# Altium PCB Ticket_Dispancer.PcbDoc (part 5 of 5)
Units mm, origin at the board's own origin, x right, y up, seen from the top; angles counter-clockwise.
Board outline 150.11 x 200.66 mm, 2 copper layers (Top Layer, Bottom Layer); 297 components, 258 nets, 997 pads, 217 vias.
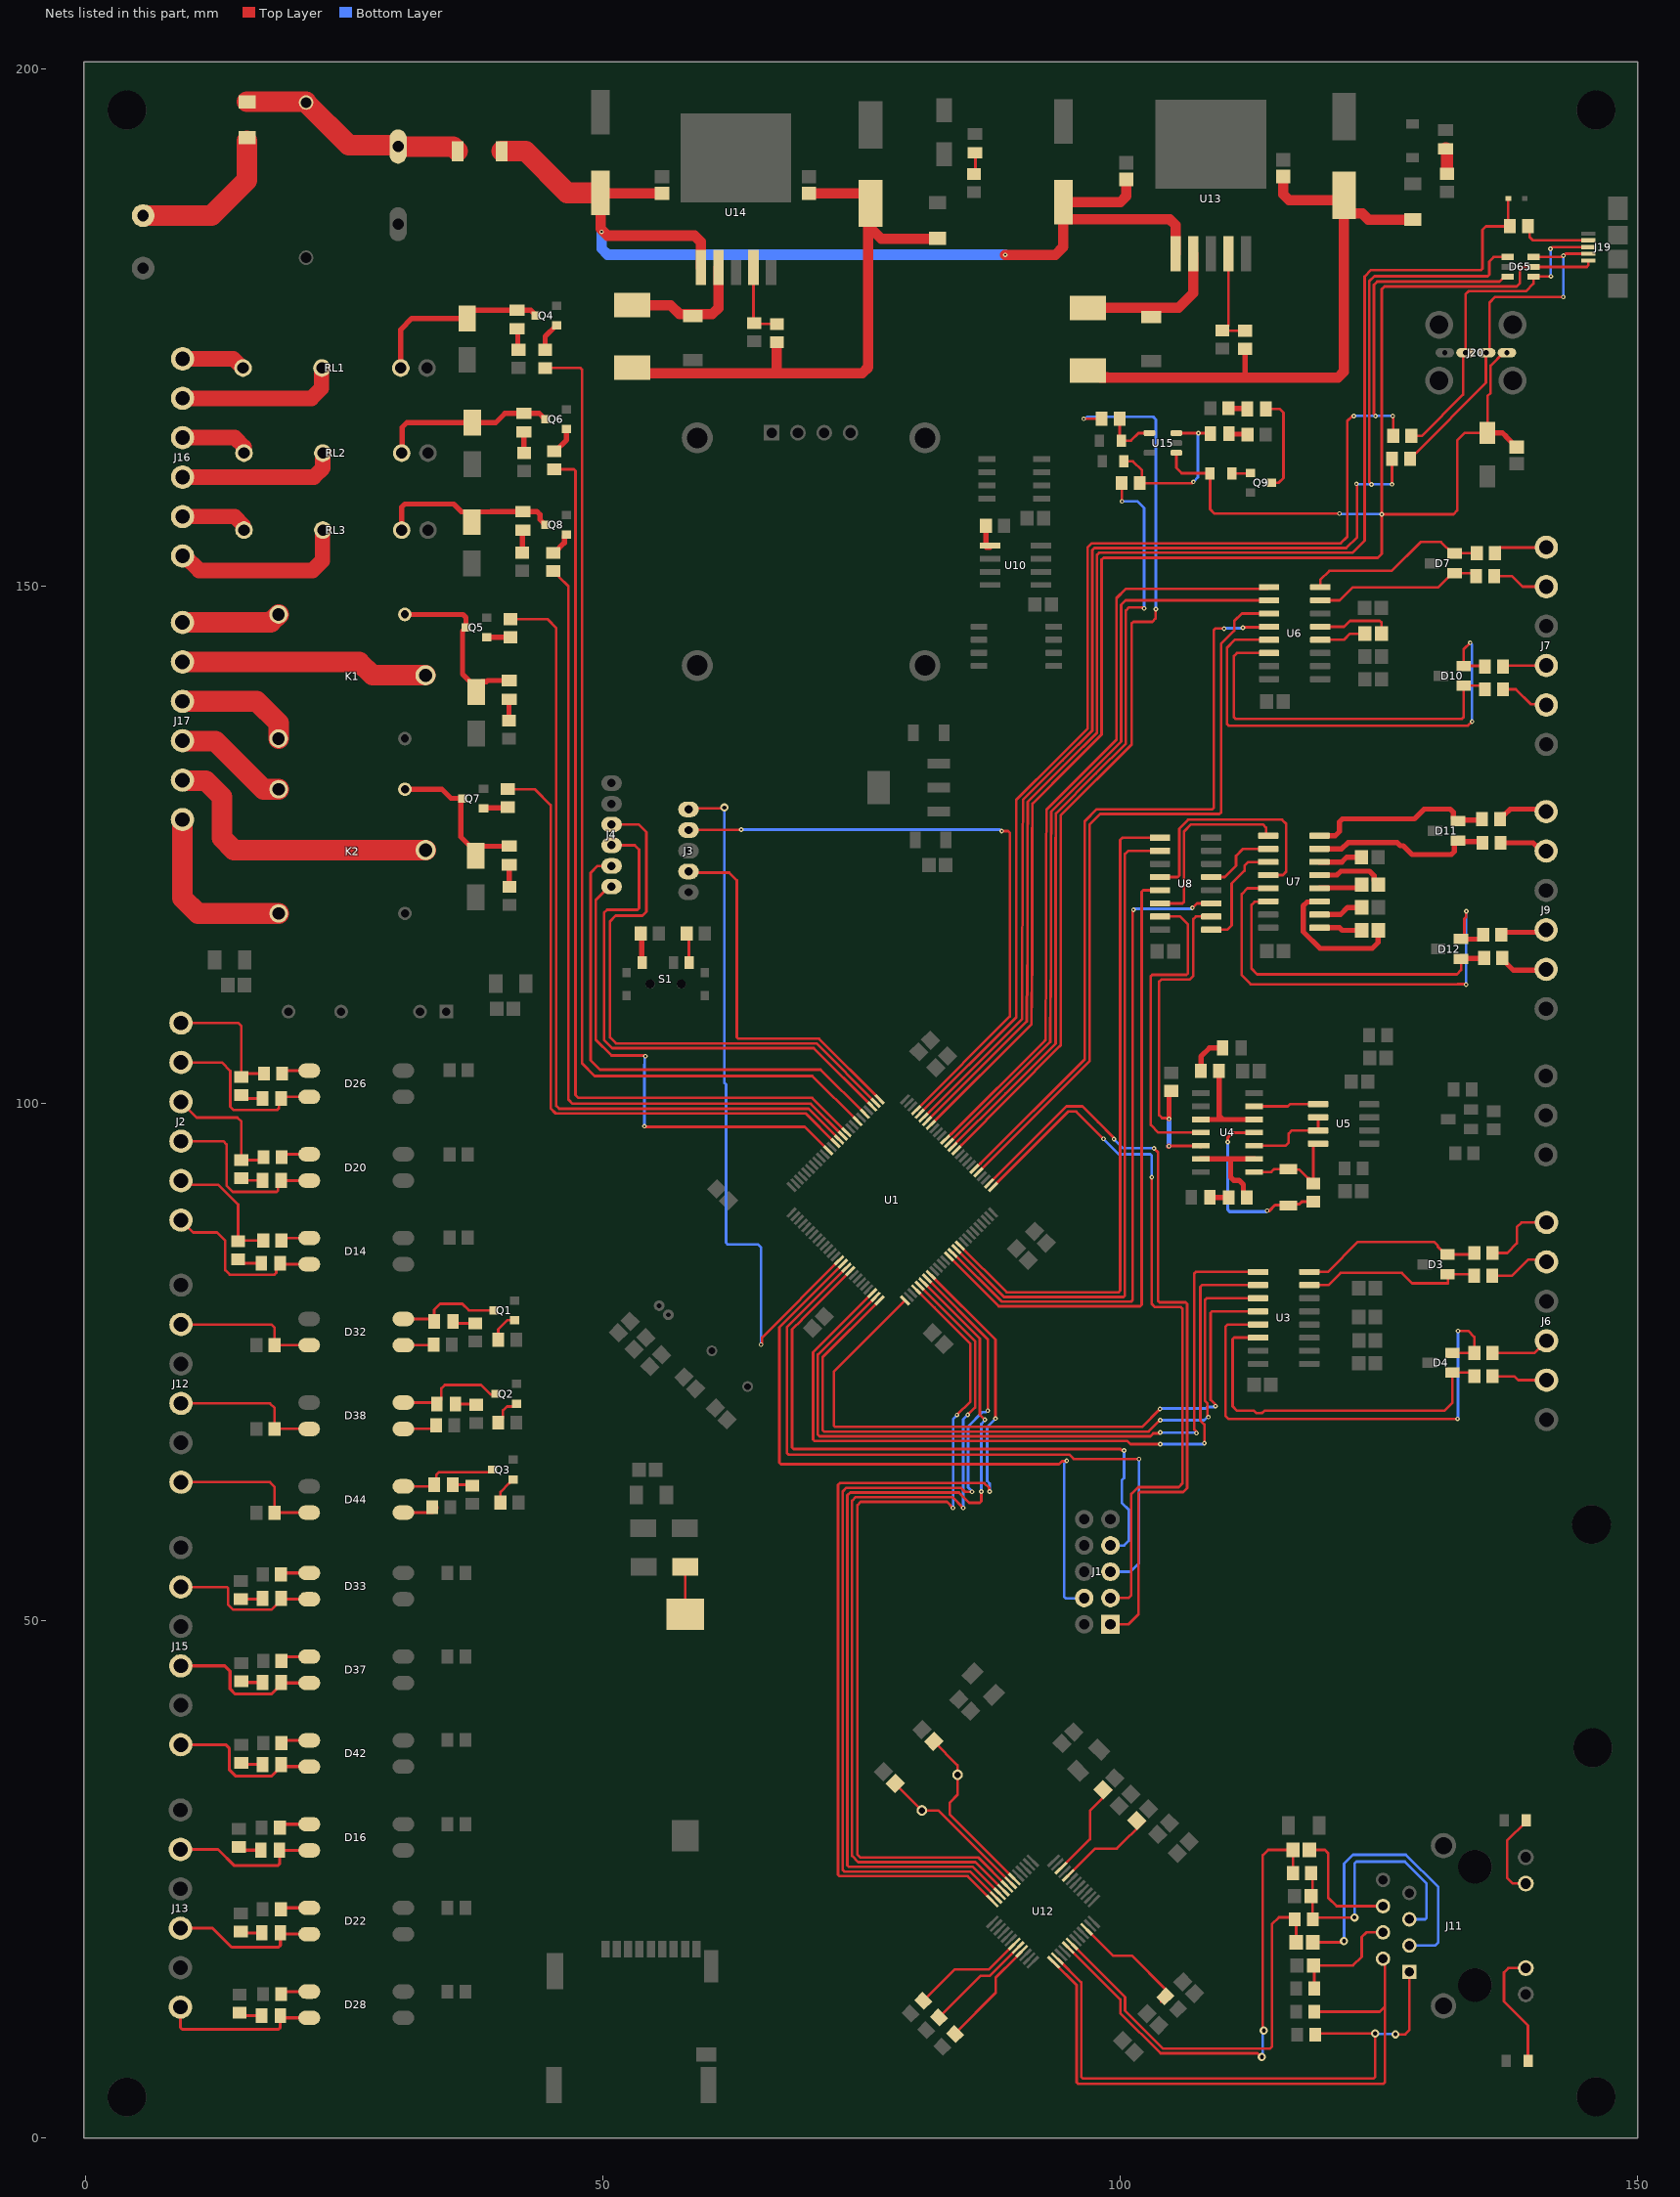
[diagram p3: the nets of this part, all layers, seen from the top]

## Via types
v1: diameter 0.45, hole 0.2, Top Layer to Bottom Layer, 169 vias
v2: diameter 0.8, hole 0.4, Top Layer to Bottom Layer, 48 vias

## Nets (pads, with @x,y where several pads share a name; then routed paths per layer and width w, separated by ;. In a path a pad name is that pad's centre, name@x,y a point inside that pad or via, vN(x,y) a via of type N, cw(c..) or ccw(c..) an arc to the next point about the centre after c; other vN are vias at no path point) (continued)
NetC30_1: C30.1 U6.5 | length 7.3
  Top Layer w0.254: U6.5@119.335,146.075 121.645,146.075 122.21,146.64 125.094,146.64 125.243,146.491 C30.1@125.243,145.396
NetC30_2: C30.2 U6.4 | length 4.6
  Top Layer w0.254: U6.4@119.335,144.805 121.615,144.805 122.206,145.396 C30.2@123.643,145.396
NetC33_1: C33.1 U7.3 | length 13.6
  Top Layer w0.5: U7.3@119.26,119.52 119.215,119.475 118.068,119.475 117.68,119.087 117.68,116.61 119.31,114.98 124.35,114.98 124.934,115.564 C33.1@124.934,116.729
NetC33_2: C33.2 U7.1 | length 4.2
  Top Layer w0.5: U7.1@119.26,116.98 121.21,116.98 121.461,116.729 C33.2@123.334,116.729
NetC34_2: C34.2 U7.2 | length 4.4
  Top Layer w0.5: U7.2@119.26,118.25 121.28,118.25 121.963,118.933 C34.2@123.334,118.933
NetC35_2: C35.2 U7.6 | length 4.2
  Top Layer w0.5: U7.6@119.26,123.33 121.42,123.33 121.88,123.79 C35.2@123.31,123.79
NetC36_1: C36.1 U7.5 | length 6.7
  Top Layer w0.5: U7.5@119.26,122.06 120.94,122.06 121.33,122.45 124.084,122.45 124.534,122.001 124.534,121.538 C36.1@124.934,121.138
NetC36_2: C36.2 U7.4 | length 4.2
  Top Layer w0.5: U7.4@119.26,120.79 119.305,120.835 123.031,120.835 C36.2@123.334,121.138
NetC48_2: C48.2 U12.31 Y3.2 | length 15.2
  Top Layer w0.254: C48.2@78.261,34.269 78.261,34.238 Y3.2@80.835,31.665 82.442,31.665 U12.31@89.428,24.679
NetC49_2: C49.2 U12.30 Y3.1 | length 17.2
  Top Layer w0.254: C49.2@81.976,38.344 84.285,36.035 Y3.1@84.285,35.115 84.285,33.165 83.54,32.42 83.54,31.274 U12.30@89.781,25.032
NetC50_1: C50.1 J11.4 R26.1 | length 11.4
  Top Layer w0.254: R26.1@118.764,14.45 118.764,16.608 C50.1@118.689,16.683 122.503,16.683 123.34,17.52 123.34,19.43 123.788,19.878 J11.4@125.402,19.878
NetC51_1: C51.1 R31.2 U12.5 | length 48.8
  Top Layer w0.254: U12.5@94.985,18.414 100.01,13.389 100.01,12.08 103.9,8.19 113.268,8.19 113.618,7.84 v2(113.69,7.84) ; v2(113.88,10.4) 113.78,10.5 113.78,27.33 114.294,27.844 C51.1@116.69,27.844 116.695,27.839 R31.2@116.695,25.612
  Bottom Layer w0.254: v2(113.69,7.84) 113.785,7.935 113.785,10.305 v2(113.88,10.4)
NetC51_2: C51.2 J11.6 | length 11.9
  Top Layer w0.254: C51.2@118.29,27.844 119.786,27.844 120.1,27.53 120.1,23.23 120.912,22.418 J11.6@125.402,22.418
NetC52_1: C52.1 R32.2 U12.6 | length 41
  Top Layer w0.254: U12.6@95.339,18.768 100.47,13.636 100.47,12.31 104.12,8.66 114.491,8.66 114.661,8.83 114.661,20.661 115.34,21.34 116.662,21.34 R32.2@116.854,21.147 117.009,20.992 C52.1@117.009,18.915
NetC52_2: C52.2 J11.3 | length 29.6
  Top Layer w0.254: C52.2@118.609,18.915 121.505,18.915 v2(121.635,19.045)
  Bottom Layer w0.254: v2(121.635,19.045) 121.635,26.525 122.49,27.38 127.61,27.38 130.74,24.25 130.74,18.94 130.408,18.608 J11.3@127.942,18.608
NetC53_2: C53.2 J11.5 R31.1 R32.1 | length 26.8
  Top Layer w0.254: R31.1@118.445,25.612 118.604,25.452 R32.1@118.604,21.147 118.777,21.32 v2(122.64,21.32)
  Bottom Layer w0.254: v2(122.64,21.32) 122.64,26.54 122.81,26.71 127.51,26.71 129.608,24.612 129.608,21.297 129.459,21.148 J11.5@127.942,21.148
NetC54_1: C54.1 U12.20 | length 9.5
  Top Layer w0.254: U12.20@94.985,25.386 97.579,27.98 99.679,27.98 C54.1@102.312,30.613
NetC55_1: C55.1 U12.22 | length 9.6
  Top Layer w0.254: U12.22@94.278,26.093 97.083,28.897 97.083,31.618 C55.1@99.114,33.65
NetC61_2: C61.2 C62.1 C66.2 C67.1 D56.C U13.1 U14.1 | length 106
  Top Layer w1: C66.2@55.72,187.96 49.821,187.96 C67.1@49.784,187.997 49.784,184.531 50.448,183.867 58.879,183.867 59.465,183.281 U14.1@59.465,180.789 ; v1(88.89,182.01) 93.74,182.01 94.51,182.78 C62.1@94.51,185.46 ; C61.2@100.59,189.3 100.59,187.696 100.004,187.11 C62.1@94.51,187.11 94.51,185.86 94.91,185.46 104.775,185.46 105.361,184.874 U13.1@105.361,182.118
  Top Layer w2: D56.C@40.225,192.024 42.545,192.024 46.572,187.997 C67.1@49.784,187.997
  Bottom Layer w1: v1(49.89,184.23) 49.89,182.606 50.476,182.02 88.88,182.02 v1(88.89,182.01)
NetC63_1: C63.1 C64.2 F2.1 L1.2 R94.1 | length 63.4
  Top Layer w0.5: 111.83,170.14 112.08,170.39 R94.1@112.08,172.925 ; C63.1@121.63,187.77 121.63,186.645 C63.1@122.53,185.745
  Top Layer w1: L1.2@96.901,170.838 97.476,170.838 98.151,170.163 98.714,170.163 98.737,170.14 111.83,170.14 121.044,170.14 121.63,170.726 C63.1@121.63,187.28 ; C64.2@115.75,189.58 115.75,187.866 116.336,187.28 121.14,187.28 C63.1@121.63,187.77 121.63,186.647 122.28,185.997 123.403,185.997 123.98,185.42 F2.1@128.27,185.42
NetC65_2: C65.2 D56.A F1.2 RV1.2 | length 22
  Top Layer w2: F1.2@15.621,196.797 C65.2@21.336,196.797 ; C65.2@21.336,196.73 25.467,192.599 RV1.2@29.972,192.599 ; RV1.2@30.226,192.472 35.527,192.472 D56.A@35.975,192.024
NetC68_1: C68.1 C69.2 F3.1 L2.2 R97.2 | length 54
  Top Layer w1: L2.2@52.832,171.092 53.354,170.57 66.72,170.57 ; R97.2@66.824,173.575 66.824,170.674 66.72,170.57 ; C69.2@69.93,187.96 75.22,187.96 C68.1@75.46,188.2 ; C68.1@75.89,186.97 75.66,186.74 75.66,171.156 75.074,170.57 66.72,170.57 ; 76.065,184.425 76.922,183.568 F3.1@81.788,183.568
NetD2_1: D2.1 J5.P | length 4.6
  Top Layer w0.254: D2.1@57.96,55.189 57.96,50.63 J5.P@57.97,50.62
NetD5_A: D5.A R6.2 | length 3.8
  Top Layer w0.5: R6.2@107.805,103.13 107.805,104.535 108.63,105.36 D5.A@109.88,105.36
NetD6_1: D6.1 R10.1 U4.11 | length 18.5
  Top Layer w0.3: v1(110.4,96.27) 110.4,96.72 110.857,97.177 U4.11@112.964,97.177 ; v1(114.2,89.63) 114.429,89.63 114.969,90.17 116.225,90.17 D6.1@116.27,90.125 116.412,90.267 117.312,90.267 117.535,90.49 R10.1@118.66,90.49
  Bottom Layer w0.3: v1(110.4,96.27) 110.4,89.716 110.576,89.54 114.11,89.54 v1(114.2,89.63)
NetD6_2: D6.2 R10.2 U4.8 U5.4 | length 10.8
  Top Layer w0.25: U4.8@112.964,93.367 114.617,93.367 114.905,93.655 D6.2@116.27,93.655 ; D6.2@116.312,93.613 117.279,93.613 R10.2@118.235,92.657 ; R10.2@118.66,92.24 U5.4@118.66,96.066
  Top Layer w0.5: D6.2@116.27,93.655 D6.2@116.312,93.613 ; R10.2@118.235,92.657 118.235,92.565 118.56,92.24 R10.2@118.66,92.24 ; U5.4@118.66,96.066 118.705,96.111 U5.4@119.125,96.111
NetD8_A: D8.A R12.2 | length 1.8
  Top Layer w0.5: D8.A@108.679,90.93 108.694,90.915 110.47,90.915 R12.2@110.485,90.9
NetD14_1: D14.1 R37.2 | length 2.8
  Top Layer w0.25: R37.2@18.95,86.76 19.18,86.99 D14.1@21.639,86.99
NetD14_2: D14.2 D18.C J2.1 | length 17.1
  Top Layer w0.25: J2.1@9.24,88.72 10.435,87.525 12.708,87.525 13.52,86.714 13.52,83.88 13.954,83.446 18.276,83.446 18.447,83.617 18.447,84.177 D18.C@18.82,84.55 18.92,84.45 D14.2@21.639,84.45
NetD16_1: D16.1 R40.2 | length 3
  Top Layer w0.3: R40.2@18.795,30.01 19.125,30.34 D16.1@21.639,30.34
NetD16_2: D16.2 D19.C J13.5 | length 14.5
  Top Layer w0.3: J13.5@9.19,27.9 12.83,27.9 14.4,26.33 18.594,26.33 18.77,26.506 D19.C@18.77,27.83 18.8,27.8 D16.2@21.639,27.8
NetD18_A: D18.A R41.2 | length 2.4
  Top Layer w0.25: R41.2@14.756,84.931 15.137,84.55 D18.A@17.02,84.55
NetD19_A: D19.A R42.1 | length 2.3
  Top Layer w0.3: R42.1@14.82,28.125 15.115,27.83 D19.A@16.97,27.83
NetD20_1: D20.1 R45.2 | length 2.8
  Top Layer w0.25: R45.2@18.959,94.81 19.229,95.08 D20.1@21.639,95.08
NetD20_2: D20.2 D24.C J2.3 | length 17.6
  Top Layer w0.25: J2.3@9.24,96.34 13.35,96.34 13.65,96.04 13.65,92.05 14.254,91.446 18.476,91.446 18.626,91.596 18.626,92.252 D24.C@18.924,92.55 18.934,92.54 D20.2@21.639,92.54
NetD22_1: D22.1 R48.2 | length 2.8
  Top Layer w0.3: R48.2@18.889,22.1 19.039,22.25 D22.1@21.639,22.25
NetD22_2: D22.2 D25.C J13.3 | length 14.4
  Top Layer w0.3: J13.3@9.19,20.28 12.31,20.28 14.14,18.45 18.674,18.45 18.85,18.626 D25.C@18.85,19.71 ; D25.C@18.85,19.83 18.97,19.71 D22.2@21.639,19.71
NetD24_A: D24.A R49.2 | length 2.1
  Top Layer w0.25: R49.2@15.08,92.765 15.295,92.55 D24.A@17.124,92.55
NetD25_A: D25.A R50.1 | length 2.1
  Top Layer w0.3: R50.1@15.01,19.965 15.145,19.83 D25.A@17.05,19.83
NetD26_1: D26.1 R53.2 | length 2.7
  Top Layer w0.25: R53.2@19.012,102.887 19.295,103.17 D26.1@21.639,103.17
NetD26_2: D26.2 D29.C J2.5 | length 17.3
  Top Layer w0.25: J2.5@9.24,103.96 13.187,103.96 14.006,103.141 14.006,99.674 14.31,99.37 18.55,99.37 18.7,99.52 18.7,100.25 19.08,100.63 D26.2@21.639,100.63
NetD28_1: D28.1 R57.2 | length 2.8
  Top Layer w0.3: R57.2@18.91,13.92 19.15,14.16 D28.1@21.639,14.16
NetD28_2: D28.2 D30.C J13.1 | length 15.8
  Top Layer w0.3: J13.1@9.19,12.66 9.19,10.686 9.366,10.51 18.658,10.51 18.834,10.686 D30.C@18.834,11.83 19.044,11.62 D28.2@21.639,11.62
NetD29_A: D29.A R56.2 | length 2.2
  Top Layer w0.25: R56.2@15.06,100.805 15.391,100.474 D29.A@17.124,100.474
NetD30_A: D30.A R58.1 | length 2.2
  Top Layer w0.3: R58.1@14.92,12.06 15.15,11.83 D30.A@17.034,11.83
NetD32_1: D32.1 R63.2 | length 3.2
  Top Layer w0.254: D32.1@30.73,76.63 33.322,76.63 33.666,76.974 R63.2@33.77,76.87
NetD32_2: D32.2 D35.C Q1.3 | length 10.7
  Top Layer w0.254: D32.2@30.73,79.17 30.87,79.31 31.18,79 31.35,79.17 33.467,79.17 D35.C@33.711,78.926 33.711,80.041 34.295,80.625 36.423,80.625 37.048,80 Q1.3@39.5,80
NetD32_4: D32.4 J12.5 R61.2 | length 14.2
  Top Layer w0.25: J12.5@9.24,78.63 17.984,78.63 18.29,78.324 R61.2@18.29,76.64 18.3,76.63 D32.4@21.63,76.63
NetD33_1: D33.1 R62.2 | length 2.8
  Top Layer w0.3: R62.2@18.903,54.47 19.053,54.62 D33.1@21.639,54.62
NetD33_2: D33.2 D34.C J15.5 | length 14.9
  Top Layer w0.25: J15.5@9.22,53.26 13.654,53.26 13.8,53.114 13.8,51.533 14.267,51.066 17.995,51.066 18.924,51.995 D34.C@18.924,52.17
  Top Layer w0.3: D34.C@18.924,52.17 19.014,52.08 D33.2@21.639,52.08
NetD34_A: D34.A R64.1 | length 2.1
  Top Layer w0.3: R64.1@15.024,52.095 17.049,52.095 D34.A@17.124,52.17
NetD35_A: D35.A R65.2 | length 2.3
  Top Layer w0.254: D35.A@35.49,78.92 35.51,78.9 35.54,78.9 35.7,78.74 R65.2@37.68,78.74
NetD37_1: D37.1 R69.2 | length 2.9
  Top Layer w0.3: R69.2@18.943,46.113 19.36,46.53 D37.1@21.639,46.53
NetD37_2: D37.2 D39.C J15.3 | length 15
  Top Layer w0.3: J15.3@9.22,45.64 13.47,45.64 13.985,45.125 13.985,43.403 14.477,42.911 17.97,42.911 18.974,43.915 18.974,43.99 D37.2@21.639,43.99
NetD38_1: D38.1 R72.2 | length 3.2
  Top Layer w0.25: D38.1@30.73,68.54 33.6,68.54 R72.2@33.84,68.78
NetD38_2: D38.2 D41.C Q2.3 | length 10.8
  Top Layer w0.25: D38.2@30.73,71.08 33.837,71.08 D41.C@33.976,70.941
  Top Layer w0.254: D41.C@33.976,70.941 34.399,71.364 34.399,72.459 34.73,72.79 38.24,72.79 39.16,71.87 39.6,71.87 Q2.3@39.664,71.934
NetD38_4: D38.4 J12.3 R71.2 | length 14.6
  Top Layer w0.25: J12.3@9.24,71.01 17.83,71.01 18.29,70.55 R71.2@18.29,68.54 ; R71.2@18.29,68.54 D38.4@21.63,68.54
NetD39_A: D39.A R70.1 | length 2.1
  Top Layer w0.3: R70.1@15.064,44.145 15.169,44.04 D39.A@17.124,44.04
NetD41_A: D41.A R75.2 | length 1.8
  Top Layer w0.25: D41.A@35.776,70.941 37.549,70.941 R75.2@37.56,70.93
NetD42_1: D42.1 R76.2 | length 2.8
  Top Layer w0.3: R76.2@18.943,38.169 19.215,38.44 D42.1@21.639,38.44
NetD42_2: D42.2 D43.C J15.1 | length 15.5
  Top Layer w0.3: J15.1@9.22,38.02 13.565,38.02 13.9,37.685 13.9,35.613 14.537,34.977 17.97,34.977 18.924,35.931 D43.C@18.924,36.105 19.13,35.9 D42.2@21.639,35.9
NetD43_A: D43.A R77.1 | length 2.1
  Top Layer w0.3: R77.1@15.064,36.271 15.229,36.105 D43.A@17.124,36.105
NetD44_1: D44.1 R80.2 | length 3.6
  Top Layer w0.25: D44.1@30.73,60.45 33.576,60.45 34.026,60.9 R80.2@34.026,60.97
NetD44_2: D44.2 D45.C Q3.3 | length 10.1
  Top Layer w0.25: D44.2@30.73,62.99 33.92,62.99 D45.C@34.07,63.14
  Top Layer w0.254: D45.C@33.708,63.14 33.907,63.339 33.907,64.097 34.153,64.343 39.083,64.343 Q3.3@39.35,64.61
NetD44_4: D44.4 J12.1 R79.2 | length 15.1
  Top Layer w0.25: J12.1@9.24,63.39 17.83,63.39 18.29,62.93 R79.2@18.29,60.44 18.3,60.45 D44.4@21.63,60.45
NetD45_A: D45.A R81.2 | length 1.8
  Top Layer w0.25: D45.A@35.87,63.14 R81.2@37.63,63.14
NetD46_A: D46.A R83.1 | length 2.1
  Top Layer w0.5: D46.A@41.71,174.85 41.785,174.775 41.785,172.915 R83.1@41.86,172.84
NetD46_C: D46.C D47.1 Q4.3 RL1.2 | length 17.9
  Top Layer w0.5: RL1.2@30.48,171.069 30.48,174.79 31.553,175.863 D47.1@36.898,175.863 36.898,176.05 37.498,176.65 D46.C@41.71,176.65 43.06,176.65 43.36,176.35 43.36,176.3 43.51,176.15 Q4.3@43.56,176.15
NetD48_A: D48.A R84.1 | length 2.1
  Top Layer w0.5: R84.1@40.947,137.005 D48.A@40.947,139.065
NetD48_C: D48.C D49.1 K1.COIL2 Q5.3 | length 17.3
  Top Layer w0.5: K1.COIL2@30.939,147.24 36.495,147.24 36.788,146.947 Q5.3@36.788,145.989 36.738,145.989 36.588,145.839 36.588,145.789 36.44,145.641 36.44,141.495 D49.1@37.772,140.163 ; D49.1@37.772,139.763 D49.1@37.772,140.163 ; D48.C@40.947,140.865 38.874,140.865 38.772,140.763 38.372,140.763 D49.1@37.772,140.163
NetD50_A: D50.A R86.1 | length 2
  Top Layer w0.5: D50.A@42.37,164.89 42.39,164.87 42.39,162.885 R86.1@42.41,162.865
NetD50_C: D50.C D51.1 Q6.3 RL2.2 | length 17.2
  Top Layer w0.5: RL2.2@30.607,162.814 30.607,165.317 31.08,165.79 D51.1@37.4,165.79 39.647,165.79 40.548,166.69 D50.C@42.37,166.69 43.87,166.69 44.45,166.11 Q6.3@44.5,166.11
NetD52_A: D52.A R88.1 | length 2.1
  Top Layer w0.5: D52.A@40.96,123.06 40.975,123.045 40.975,120.94 R88.1@40.99,120.925
NetD52_C: D52.C D53.1 K2.COIL2 Q7.3 | length 16.1
  Top Layer w0.5: K2.COIL2@30.88,130.36 34.45,130.36 35.336,129.474 Q7.3@36.481,129.474 36.431,129.474 36.281,129.324 36.281,129.274 36.28,129.273 36.28,125.759 37.719,124.32 D53.1@37.719,123.92 37.719,124.26 38.319,124.86 D52.C@40.96,124.86
NetD54_A: D54.A R90.1 | length 2.2
  Top Layer w0.5: R90.1@42.22,153.22 42.245,153.245 42.245,155.375 D54.A@42.27,155.4
NetD54_C: D54.C D55.1 Q8.3 RL3.2 | length 18.3
  Top Layer w0.5: RL3.2@30.572,155.408 30.572,157.639 30.865,157.932 35.584,157.932 36.338,157.178 36.738,157.178 D55.1@37.338,156.578 ; D55.1@37.338,156.178 D55.1@37.338,156.578 ; Q8.3@44.49,155.909 44.44,155.909 43.936,156.413 43.936,156.904 43.64,157.2 D54.C@42.27,157.2 39.18,157.2 39.158,157.178 37.938,157.178 D55.1@37.338,156.578
NetD58_C: D58.C L1.1 U13.2 | length 14.6
  Top Layer w1: L1.1@96.901,176.888 105.628,176.888 107.061,178.321 U13.2@107.061,182.118
NetD59_A: D59.A R93.2 | length 2.5
  Top Layer w1.2: D59.A@131.445,192.267 131.52,192.267 131.572,192.215 R93.2@131.572,189.837
NetD61_C: D61.C L2.1 U14.2 | length 12.9
  Top Layer w1: L2.1@52.832,177.142 56.56,177.142 57.427,176.275 60.579,176.275 61.165,176.861 U14.2@61.165,180.789
NetD62_A: D62.A R96.2 | length 2.7
  Top Layer w0.254: D62.A@85.97,191.89 D62.A@86.27,192.19 ; R96.2@86.021,189.83 D62.A@86.021,192.12
NetD63_A: D63.A R99.1 | length 1.9
  Top Layer w0.5: D63.A@110.5,164.73 110.552,164.678 112.258,164.678 R99.1@112.31,164.626
NetD63_C: D63.C R101.1 R103.1 U15.3 | length 16.9
  Top Layer w0.254: R101.1@100.364,162.052 101.238,162.052 102.11,161.18 102.11,160.174 R103.1@101.884,159.948 106.948,159.948 v1(107.07,160.07) ; U15.3@105.429,164.78 107.513,164.78 v1(107.549,164.78) 108.65,164.78 D63.C@108.7,164.73
  Bottom Layer w0.254: v1(107.07,160.07) 107.513,160.513 107.513,164.744 v1(107.549,164.78)
NetD65_4: D65.4 J19.3 J20.3 R105.2 | length 32.4
  Top Layer w0.254: R105.2@128.129,164.51 129.15,164.51 133.138,168.498 133.138,172.321 J20.3@133.372,172.554 133.372,178.212 133.66,178.5 139.217,178.5 139.934,179.217 D65.4@139.934,179.898 140.107,179.725 140.296,179.914 141.604,179.914 v1(141.62,179.93) ; v1(141.57,182.58) 141.75,182.76 J19.3@145.232,182.76
  Bottom Layer w0.254: v1(141.57,182.58) 141.595,182.555 141.595,179.955 v1(141.62,179.93)
NetD65_6: D65.6 J19.2 J20.2 R104.2 | length 35.1
  Top Layer w0.254: R104.2@128.016,162.306 128.016,162.406 128.464,162.854 128.564,162.854 135.347,169.637 135.347,172.505 135.695,172.853 135.695,177.385 136.25,177.94 v1(142.82,177.94) ; D65.6@139.934,181.798 142.645,181.798 142.777,181.93 142.883,181.93 143.063,182.11 J19.2@145.232,182.11
  Bottom Layer w0.254: v1(142.82,177.94) 142.825,177.945 142.825,181.925 v1(142.83,181.93)
NetD67_A: D67.A R107.1 | length 1.8
  Top Layer w0.5: R107.1@110.47,167.18 110.495,167.155 112.255,167.155 D67.A@112.28,167.13
NetD67_C: D67.C Q9.3 | length 9.6
  Top Layer w0.254: D67.C@114.08,167.13 115.38,167.13 115.77,166.74 115.77,160.44 115.31,159.98 Q9.3@114.61,159.98
  Top Layer w0.5: D67.C@114.08,167.13 D67.C@114.177,167.033
NetF1_1: F1.1 J18.1 | length 15.3
  Top Layer w2: J18.1@5.588,185.801 12.192,185.801 15.621,189.23 F1.1@15.621,193.033
NetJ2_2: J2.2 R37.1 R41.1 | length 12.5
  Top Layer w0.25: J2.2@9.24,92.53 9.623,92.147 12.836,92.147 14.756,90.228 R41.1@14.756,86.681 14.835,86.76 R37.1@17.2,86.76
NetJ2_4: J2.4 R45.1 R49.1 | length 12.6
  Top Layer w0.25: J2.4@9.24,100.15 10.76,98.63 14.68,98.63 15.08,98.23 R49.1@15.08,94.515 16.914,94.515 R45.1@17.209,94.81
NetJ2_6: J2.6 R53.1 R56.1 | length 13.2
  Top Layer w0.25: J2.6@9.24,107.77 14.79,107.77 15.06,107.5 R56.1@15.06,102.555 15.392,102.887 R53.1@17.262,102.887
NetJ6_1: J6.1 R5.1 | length 7.4
  Top Layer w0.254: R5.1@135.975,85.544 137.404,85.544 138.33,86.47 138.33,88.04 138.78,88.49 J6.1@141.2,88.49
NetJ6_2: J6.2 R7.1 | length 6
  Top Layer w0.254: R7.1@135.945,83.34 137.86,83.34 138.58,84.06 139.42,84.9 140.98,84.9 J6.2@141.2,84.68
NetJ6_4: J6.4 R3.1 | length 5.7
  Top Layer w0.254: R3.1@135.975,75.87 140.01,75.87 J6.4@141.2,77.06
NetJ6_5: J6.5 R4.1 | length 5.4
  Top Layer w0.254: R4.1@135.975,73.626 138.094,73.626 138.47,73.25 J6.5@141.2,73.25
NetJ7_1: J7.1 R15.1 | length 5.3
  Top Layer w0.254: R15.1@136.216,153.174 136.216,153.274 136.664,153.722 141.152,153.722 J7.1@141.18,153.75
NetJ7_2: J7.2 R17.1 | length 5.5
  Top Layer w0.254: R17.1@136.145,150.97 137.85,150.97 138.88,149.94 J7.2@141.18,149.94
NetJ7_4: J7.4 R9.1 | length 4.2
  Top Layer w0.254: R9.1@136.995,142.22 137.095,142.32 J7.4@141.18,142.32
NetJ7_5: J7.5 R11.1 | length 4.8
  Top Layer w0.254: R11.1@136.991,140.016 138.234,140.016 139.674,138.576 141.114,138.576 J7.5@141.18,138.51
NetJ9_1: J9.1 R22.1 | length 5
  Top Layer w0.5: R22.1@136.715,127.48 136.715,127.58 137.04,127.905 137.14,127.905 137.685,128.45 140.91,128.45 J9.1@141.16,128.2
NetJ9_2: J9.2 R23.1 | length 4.7
  Top Layer w0.5: R23.1@136.745,125.18 139.896,125.18 140.686,124.39 J9.2@141.16,124.39
NetJ9_4: J9.4 R20.1 | length 4.5
  Top Layer w0.5: R20.1@136.825,116.3 137.06,116.535 140.925,116.535 J9.4@141.16,116.77
NetJ9_5: J9.5 R21.1 | length 4.8
  Top Layer w0.5: R21.1@136.925,114.05 136.925,113.95 137.995,112.88 141.08,112.88 J9.5@141.16,112.96
NetJ11_1: J11.1 R25.1 U12.2 | length 60.1
  Top Layer w0.254: U12.2@93.925,17.353 96.238,15.04 96.238,5.909 96.387,5.76 124.491,5.76 124.64,5.909 v2(124.64,10.1) 118.958,10.1 R25.1@118.844,9.986 ; v2(126.6,10.03) 127.54,10.03 127.942,10.432 J11.1@127.942,16.068
  Bottom Layer w0.254: v2(124.64,10.1) 124.675,10.065 126.565,10.065 v2(126.6,10.03)
NetJ11_2: J11.2 R24.1 U12.1 | length 61.5
  Top Layer w0.254: U12.1@93.571,17 95.784,14.787 95.784,5.399 95.933,5.25 125.441,5.25 125.59,5.399 125.59,12.74 ; R24.1@118.764,12.218 125.068,12.218 125.59,12.74 ; J11.2@125.402,17.338 125.59,17.15 125.59,12.74
NetJ11_10: J11.10 R33.2 | length 11.8
  Top Layer w0.254: J11.10@139.192,16.433 137.513,16.433 137.09,16.01 137.09,13.2 139.41,10.88 R33.2@139.41,7.46
NetJ11_11: J11.11 R34.2 | length 8.3
  Top Layer w0.254: J11.11@139.192,24.603 137.957,24.603 137.39,25.17 137.39,28.73 139.226,30.566 R34.2@139.226,30.716
NetJ16_1: J16.1 RL3.5 | length 17.5
  Top Layer w1.5: J16.1@9.398,152.908 9.601,152.908 10.998,151.511 21.971,151.511 22.913,152.453 22.913,155.37 RL3.5@22.952,155.408
NetJ16_2: J16.2 RL3.8 | length 6.7
  Top Layer w1.5: J16.2@9.398,156.718 14.45,156.718 15.255,155.839 RL3.8@15.332,155.408
NetJ16_3: J16.3 RL2.5 | length 15.3
  Top Layer w1.5: J16.3@9.398,160.528 22.07,160.528 22.949,161.407 22.949,162.776 RL2.5@22.987,162.814
NetJ16_4: J16.4 RL2.8 | length 7
  Top Layer w1.5: J16.4@9.398,164.338 14.45,164.338 15.329,163.459 RL2.8@15.329,162.852 RL2.8@15.367,162.814
NetJ16_5: J16.5 RL1.5 | length 15.8
  Top Layer w1.5: J16.5@9.398,168.148 21.844,168.148 22.822,169.126 22.822,171.031 RL1.5@22.86,171.069
NetJ16_6: J16.6 RL1.8 | length 6.2
  Top Layer w1.5: J16.6@9.398,171.958 14.297,171.958 15.186,171.069 RL1.8@15.24,171.069
NetJ17_1: J17.1 K2.NC | length 17.5
  Top Layer w2: J17.1@9.39,127.43 9.39,119.85 10.88,118.36 K2.NC@18.68,118.36
NetJ17_2: J17.2 K2.COM | length 28.6
  Top Layer w2: J17.2@9.39,131.24 9.438,131.192 11.628,131.192 13.19,129.63 13.19,125.652 14.362,124.48 K2.COM@32.88,124.48
NetJ17_3: J17.3 K2.NO | length 11.2
  Top Layer w2: J17.3@9.39,135.05 9.438,135.002 12.568,135.002 17.21,130.36 K2.NO@18.68,130.36
NetJ17_4: J17.4 K1.NC | length 11.7
  Top Layer w2: J17.4@9.39,138.86 16.56,138.86 18.673,136.748 K1.NC@18.673,135.255
NetJ17_5: J17.5 K1.COM | length 24
  Top Layer w2: J17.5@9.39,142.67 26.45,142.67 27.745,141.375 K1.COM@32.872,141.375
NetJ17_6: J17.6 K1.NO | length 9.6
  Top Layer w2: J17.6@9.39,146.48 17.898,146.48 K1.NO@18.673,147.255
NetJ19_4: J19.4 R106.2 | length 6.9
  Top Layer w0.254: R106.2@139.418,184.785 139.57,184.633 139.57,183.74 139.9,183.41 J19.4@145.232,183.41
NetQ1_1: Q1.1 R68.2 | length 3
  Top Layer w0.254: R68.2@39.895,77.16 39.895,78.175 40.76,79.04 Q1.1@41.56,79.04
NetQ2_1: Q2.1 R78.2 | length 2.9
  Top Layer w0.254: R78.2@39.909,69.155 40.357,69.603 40.357,70.328 40.74,70.711 41.391,70.711 Q2.1@41.664,70.984
NetQ3_1: Q3.1 R82.2 | length 2.8
  Top Layer w0.254: R82.2@40.115,61.43 40.115,62.458 40.937,63.28 40.97,63.28 Q3.1@41.35,63.66
NetQ4_1: Q4.1 R85.2 | length 2.9
  Top Layer w0.5: R85.2@44.43,172.825 44.43,174.12 45.51,175.2 Q4.1@45.56,175.2
NetQ5_1: Q5.1 R87.2 | length 2.3
  Top Layer w0.5: Q5.1@38.788,145.039 38.793,145.043 41.069,145.043 R87.2@41.074,145.048
NetQ6_1: Q6.1 R89.2 | length 2.7
  Top Layer w0.5: R89.2@45.3,163.03 45.4,163.03 46.5,164.13 Q6.1@46.5,165.16
NetQ7_1: Q7.1 R91.2 | length 2.4
  Top Layer w0.5: Q7.1@38.481,128.524 38.529,128.572 40.782,128.572 R91.2@40.83,128.62
NetQ8_1: Q8.1 R92.2 | length 2.4
  Top Layer w0.5: R92.2@45.22,153.205 45.32,153.205 46.29,154.175 46.29,154.809 46.44,154.959 Q8.1@46.49,154.959
NetQ9_1: Q9.1 R108.1 | length 1.8
  Top Layer w0.254: R108.1@110.79,160.89 112.57,160.89 Q9.1@112.61,160.93
NetR1_2: R1.2 S1.1 | length 3.1
  Top Layer w0.254: R1.2@53.492,116.795 R1.2@53.675,116.978
  Top Layer w0.5: R1.2@53.675,116.43 53.752,116.352 53.752,113.683 S1.1@53.83,113.606
NetR2_1: R2.1 S1.3 | length 2.9
  Top Layer w0.254: R2.1@58.11,116.42 58.33,116.2 S1.3@58.33,113.606
NetR6_1: R6.1 U4.3 U4.12 | length 10
  Top Layer w0.5: U4.3@107.782,98.447 109.91,98.447 ; R6.1@109.555,103.13 109.555,98.802 109.91,98.447 ; U4.12@112.964,98.447 109.91,98.447
NetR12_1: R12.1 U4.6 U4.9 | length 9.9
  Top Layer w0.5: U4.6@107.782,94.637 110.67,94.637 ; R12.1@112.235,90.9 111.91,91.225 111.91,92.14 111.48,92.57 110.963,92.57 110.67,92.863 110.67,94.637 ; U4.9@112.964,94.637 110.67,94.637
NetR27_2: R27.2 U12.45 | length 10.7
  Top Layer w0.254: R27.2@84.008,10.069 87.97,14.031 87.97,15.496 89.965,17.49 89.965,17.518 90.488,18.042 U12.45@90.488,18.06
NetR28_2: R28.2 U12.44 | length 10.4
  Top Layer w0.254: R28.2@82.484,11.662 86.521,15.7 87.421,15.7 U12.44@90.135,18.414
NetR29_2: R29.2 U12.43 | length 11.1
  Top Layer w0.254: R29.2@80.976,13.272 84.014,16.31 87.324,16.31 U12.43@89.781,18.768
NetR30_2: R30.2 U12.10 | length 10.8
  Top Layer w0.254: U12.10@96.753,20.182 99.299,17.636 101.114,17.636 104.388,14.362 104.388,13.728 R30.2@104.35,13.69 ; R30.2@103.931,13.179 R30.2@103.98,13.227
NetR35_2: R35.2 U10.1 | length 2.5
  Top Layer w0.5: R35.2@87.03,155.83 87.03,153.784 87.059,153.755 U10.1@87.426,153.755
NetR94_2: R94.2 R95.1 U13.4 | length 9.9
  Top Layer w0.254: U13.4@110.461,182.118 110.461,175.19 109.976,174.705 R95.1@109.876,174.705 109.906,174.675 R94.2@112.08,174.675
NetR97_1: R97.1 R98.1 U14.4 | length 7.6
  Top Layer w0.254: U14.4@64.565,180.789 64.565,175.455 R98.1@64.62,175.4 64.695,175.325 R97.1@66.824,175.325
NetR100_1: R100.1 R102.2 U15.4 | length 5.2
  Top Layer w0.254: R102.2@99.949,166.161 99.949,164.217 R100.1@100.11,164.056 101.046,164.056 101.77,164.78 U15.4@102.84,164.78
NetU4_10: U4.10 U5.2 U5.3 | length 8.6
  Top Layer w0.25: U4.10@112.964,95.907 115.984,95.907 ; 116.277,96.2 116.277,97.088 116.57,97.381 U5.3@119.125,97.381
  Top Layer w0.254: 115.984,95.907 116.277,96.2 ; U5.3@119.125,97.381 U5.2@119.125,98.651
NetU4_13: U4.13 U5.1 | length 6.2
  Top Layer w0.25: U4.13@112.964,99.717 116.207,99.717 116.411,99.921 U5.1@119.125,99.921
NRST: J3.5 U1.14 | length 69.9
  Top Layer w0.254: J3.5@58.29,128.41 58.38,128.5 61.66,128.5 v2(61.75,128.59) ; v1(65.29,76.68) 65.394,76.784 65.394,77.387 U1.14@72.851,84.844
  Bottom Layer w0.254: v2(61.75,128.59) 61.75,101.988 61.916,101.822 61.916,86.529 62.065,86.38 65,86.38 65.29,86.09 v1(65.29,76.68)
OTG_DM: D65.1 R104.1 U1.70 | length 133.6
  Top Layer w0.254: U1.70@80.983,98.633 90.528,108.178 90.536,109.021 90.581,125.245 90.616,128.926 90.616,128.928 90.616,129.339 94.437,133.159 97.302,136.025 97.302,153.462 97.514,153.674 121.844,153.674 122.9,154.73 122.9,159.815 v1(122.835,159.88) ; v1(124.287,159.808) 124.287,159.843 124.07,160.06 124.07,179.46 124.56,179.95 135.513,179.95 135.662,180.099 135.662,181.361 135.95,181.649 136.099,181.798 D65.1@137.434,181.798 ; v1(126.26,159.83) 126.266,159.836 R104.1@126.266,162.306
  Bottom Layer w0.254: v1(122.835,159.88) 122.885,159.83 v1(126.26,159.83)
OTG_DP: D65.3 R105.1 U1.71 | length 130.7
  Top Layer w0.254: U1.71@80.63,98.986 89.957,108.314 89.957,129.322 93.983,133.347 96.848,136.213 96.848,153.718 97.258,154.128 121.328,154.128 121.946,154.745 121.946,165.96 122.426,166.44 v1(122.57,166.44) ; v1(124.676,166.44) 124.676,166.493 124.524,166.645 124.524,179.104 124.84,179.42 136.656,179.42 137.134,179.898 D65.3@137.434,179.898 ; v1(126.34,166.44) 126.379,166.401 R105.1@126.379,164.51
  Bottom Layer w0.254: v1(122.57,166.44) v1(126.34,166.44)
OTG_EN: R102.1 U1.61 | length 88.6
  Top Layer w0.254: U1.61@84.165,95.451 84.483,95.798 84.668,95.983 94.139,105.508 ; 94.139,105.509 94.248,105.617 94.248,127.834 101.116,134.702 101.116,146.389 101.265,146.538 103.108,146.538 103.419,146.849 103.419,147.739 v1(103.45,147.77) ; v1(96.48,166.161) R102.1@98.199,166.161
  Bottom Layer w0.254: v1(96.48,166.161) 96.628,166.161 96.828,166.36 103.187,166.36 103.45,166.097 v1(103.45,147.77)
OTG_ID: D64.1 R106.1 U1.69 | length 134.5
  Top Layer w0.254: U1.69@81.337,98.279 90.98,107.922 91.026,112.893 91.035,114.021 91.035,125.056 91.07,128.738 91.07,128.74 91.07,129.151 94.891,132.971 97.756,135.837 97.756,153.026 97.95,153.22 122.45,153.22 123.616,154.386 123.616,179.906 124.25,180.54 134.861,180.54 135.01,180.689 135.01,184.44 135.34,184.77 137.653,184.77 R106.1@137.668,184.785 137.503,184.95 D64.1@137.503,187.452
OTG_OC: R103.2 U1.62 | length 74.6
  Top Layer w0.254: U1.62@83.812,95.805 83.812,95.834 88.939,100.961 88.949,100.961 93.759,105.77 93.759,123.929 93.794,127.609 93.794,127.612 93.794,128.022 97.654,131.883 100.55,134.778 100.55,147.64 100.85,147.94 101.575,147.94 101.577,147.938 102.206,147.938 v1(102.31,147.834) ; R103.2@100.134,159.948 100.17,159.912 v1(100.17,158.19)
  Bottom Layer w0.254: v1(100.17,158.19) 101.65,158.19 102.31,157.53 v1(102.31,147.834)
OTG_VBUS: C73.2 D65.5 D66.C J19.1 J20.1 R108.2 U1.68 U15.1 | length 191.2
  Top Layer w0.254: U1.68@81.69,97.926 91.431,107.667 91.489,113.861 91.489,124.867 91.524,128.55 91.524,128.552 91.524,128.962 95.345,132.783 98.21,135.648 98.21,152.55 98.39,152.73 124.9,152.73 125.282,153.112 125.282,156.928 v1(125.27,156.94) ; U15.1@105.429,162.88 105.429,161.421 105.94,160.91 108.67,160.91 R108.2@108.69,160.89 108.69,157.43 109.12,157 v1(121.19,157) ; J20.1@137.372,172.554 137.064,172.554 135.801,171.291 135.801,168.67 135.49,168.359 D66.C@135.49,164.805 133.295,164.805 132.57,164.08 132.57,157.299 132.211,156.94 v1(125.27,156.94) ; J19.1@145.232,181.46 145.232,180.997 145.083,180.848 D65.5@139.934,180.848 138.978,180.848 138.62,180.49 138.62,179.25 138.324,178.954 125.545,178.954 125.282,178.691 125.282,166.189 125.27,166.177 v1(125.27,156.94)
  Top Layer w0.5: D66.C@135.49,164.805 136.955,164.805 137.309,164.451 137.309,164.401 138.28,163.43 C73.2@138.33,163.43
  Bottom Layer w0.254: v1(121.19,157) 121.22,156.97 125.24,156.97 v1(125.27,156.94)
RL1: R85.1 U1.82 | length 99.6
  Top Layer w0.254: R85.1@44.43,171.075 47.854,171.075 48.003,170.926 48.003,103.857 49.21,102.65 70.249,102.65 U1.82@74.619,98.279
RL2: R89.1 U1.85 | length 90.2
  Top Layer w0.254: R89.1@45.3,161.28 47.211,161.28 47.36,161.131 47.36,100.8 47.631,100.529 70.251,100.529 U1.85@73.595,97.185
RL3: R92.1 U1.86 | length 79.5
  Top Layer w0.254: R92.1@45.22,151.455 45.32,151.455 45.768,151.007 45.768,150.907 46.68,149.995 46.68,100.38 47.09,99.97 70.1,99.97 U1.86@73.072,96.998
RL4: R87.1 U1.87 | length 79.5
  Top Layer w0.254: R87.1@41.074,146.798 44.652,146.798 45.51,145.94 45.51,99.77 45.795,99.485 69.907,99.485 U1.87@72.777,96.615
RL5: R91.1 U1.88 | length 62.9
  Top Layer w0.254: R91.1@40.83,130.37 43.42,130.37 44.97,128.82 44.97,99.51 45.449,99.031 69.625,99.031 U1.88@72.415,96.241
RX2: D4.2 R3.2 U3.13 | length 48.4
  Top Layer w0.254: U3.13@113.33,78.629 110.389,78.629 110.17,78.41 110.17,69.8 110.46,69.51 v1(132.6,69.51) ; D4.2@132.11,75.88 134.215,75.88 R3.2@134.225,75.87 134.225,77.425 133.64,78.01 v1(132.64,78.01)
  Bottom Layer w0.254: v1(132.6,69.51) 132.64,69.55 v1(132.64,78.01)
RX3: D10.2 R9.2 U6.13 | length 48
  Top Layer w0.254: U6.13@114.385,144.805 111.075,144.805 110.32,144.05 110.32,136.653 110.469,136.504 133.604,136.504 v1(134,136.9) ; v1(133.81,144.52) 133.19,143.9 D10.2@133.19,142.28 135.185,142.28 R9.2@135.245,142.22
  Bottom Layer w0.254: v1(133.81,144.52) 134,144.33 v1(134,136.9)
RX4: D3.2 R5.2 U3.8 | length 17.8
  Top Layer w0.254: U3.8@118.28,83.709 120.079,83.709 122.98,86.61 130.35,86.61 130.698,86.262 130.698,86.132 131.43,85.4 D3.2@131.63,85.4 134.081,85.4 R5.2@134.225,85.544
RX6: D7.2 R15.2 U6.8 | length 17.8
  Top Layer w0.254: U6.8@119.335,149.885 119.335,150.585 120.22,151.47 126.24,151.47 129.03,154.26 131,154.26 132.11,153.15 D7.2@132.31,153.15 132.334,153.174 R15.2@134.466,153.174
SPI1_CS: U1.29 U12.32 | length 83.1
  Top Layer w0.254: U1.29@80.276,82.016 82.03,80.262 82.035,80.262 85.522,76.775 85.522,71.182 v1(84.23,69.89) ; v1(83.85,60.9) 83.26,61.49 74.93,61.49 74.606,61.166 74.606,27.399 74.879,27.126 86.273,27.126 U12.32@89.074,24.325
  Bottom Layer w0.254: v1(83.85,60.9) 83.85,69.457 84.23,69.837 v1(84.23,69.89)
SPI1_INT: U1.33 U12.36 | length 92.9
  Top Layer w0.254: U1.33@81.69,83.43 87.943,77.178 87.943,69.557 v1(87.96,69.54) ; v1(87.38,62.48) 87.342,62.518 87.342,62.848 86.884,63.306 72.906,63.306 72.73,63.13 72.73,25.459 72.879,25.31 85.261,25.31 U12.36@87.66,22.911
  Bottom Layer w0.254: v1(87.38,62.48) 87.382,62.482 87.382,63.261 87.14,63.503 87.14,68.733 87.947,69.54 v1(87.96,69.54)
SPI1_MISO: U1.31 U12.34 | length 88.9
  Top Layer w0.254: U1.31@80.983,82.723 86.43,77.276 86.43,69.917 v1(86.927,69.42) ; v1(86.58,62.48) 86.58,61.554 86.431,61.406 85.409,61.406 84.416,62.398 73.908,62.398 73.64,62.13 73.64,26.367 73.789,26.218 85.767,26.218 U12.34@88.367,23.618
  Bottom Layer w0.254: v1(86.58,62.48) 86.58,69.02 86.927,69.367 v1(86.927,69.42)
SPI1_MOSI: U1.32 U12.35 | length 89.5
  Top Layer w0.254: U1.32@81.337,83.077 87.21,77.203 v1(87.21,70.3) ; v1(85.67,62.46) 84.997,62.46 84.605,62.852 73.552,62.852 73.184,62.484 73.184,25.913 73.333,25.764 85.496,25.764 87.995,23.265 U12.35@88.013,23.265
  Bottom Layer w0.254: v1(85.67,62.46) 85.67,62.513 85.298,62.885 85.298,68.771 86.69,70.163 87.02,70.163 87.157,70.3 v1(87.21,70.3)
SPI1_SCK: U1.30 U12.33 | length 85.8
  Top Layer w0.254: U1.30@80.63,82.37 85.976,77.023 85.976,70.606 v1(85.27,69.9) ; v1(84.84,60.9) 83.796,61.944 74.434,61.944 74.094,61.604 74.094,27.269 74.691,26.672 86.02,26.672 U12.33@88.72,23.972
  Bottom Layer w0.254: v1(84.84,60.9) 84.84,69.47 v1(85.27,69.9)
SPI2_CS: J1.3 U1.51 | length 71.8
  Top Layer w0.254: U1.51@87.701,91.915 87.701,91.945 94.966,99.21 95.75,99.21 v1(98.39,96.57) ; J1.3@99.06,52.197 100.813,52.197 101.07,52.454 101.07,62.24 101.738,62.908 105.658,62.908 106.022,63.272 106.022,80.167 105.873,80.316 103.343,80.316 103.054,80.605 v1(103.054,92.87)
  Bottom Layer w0.254: v1(98.39,96.57) 98.39,96.548 99.858,95.08 102.905,95.08 103.054,94.931 v1(103.054,92.87)
SPI2_INT: J1.4 U1.15 | length 65
  Top Layer w0.254: U1.15@73.205,84.491 73.205,84.465 73.179,84.465 67.07,78.356 67.07,65.271 67.219,65.122 94.087,65.122 94.387,65.422 94.792,65.422 v1(94.83,65.46)
  Bottom Layer w0.254: v1(94.83,65.46) 94.58,65.21 94.58,52.319 94.729,52.17 96.493,52.17 J1.4@96.52,52.197
SPI2_MISO: J1.7 U1.17 | length 62.6
  Top Layer w0.254: U1.17@73.912,83.784 69.225,79.097 69.225,79.089 68.3,78.164 68.3,66.739 68.449,66.59 100.025,66.59 100.128,66.488 100.342,66.488 v1(100.38,66.45)
  Bottom Layer w0.254: J1.7@99.06,57.277 100.377,57.277 100.846,57.746 100.846,60.714 100.16,61.4 100.16,63.576 100.38,63.796 v1(100.38,66.45)
SPI2_MOSI: J1.5 U1.16 | length 67.7
  Top Layer w0.254: U1.16@73.559,84.137 67.79,78.369 67.79,66.215 67.939,66.066 95.081,66.066 95.517,65.63 v1(101.82,65.63)
  Bottom Layer w0.254: J1.5@99.06,54.737 100.987,54.737 101.82,55.57 v1(101.82,65.63)
SPI2_SCK: J1.1 U1.52 | length 76.1
  Top Layer w0.254: U1.52@87.347,92.269 94.798,99.72 96.343,99.72 97.853,98.21 99.302,96.761 99.302,96.701 99.4,96.603 v1(99.4,96.55) ; J1.1@99.06,49.657 100.813,49.657 101.76,50.604 101.76,62.288 101.909,62.437 106.087,62.437 106.476,62.826 106.476,80.621 106.327,80.77 103.809,80.77 103.66,80.919 103.66,95.26 103.274,95.646 v1(103.274,95.663)
  Bottom Layer w0.254: v1(99.4,96.55) 99.4,96.53 100.267,95.663 v1(103.274,95.663)
SPI3_CS: J4.4 U1.77 | length 54.8
  Top Layer w0.254: J4.4@50.85,126.95 53.49,126.95 54.22,126.22 54.22,118.52 53.844,118.144 51.244,118.144 50.7,117.6 50.7,106.38 51.285,105.795 70.639,105.795 U1.77@76.387,100.047
SPI3_MISO: J4.1 U1.90 | length 46.6
  Top Layer w0.254: J4.1@50.85,120.95 50.6,120.95 49.324,119.674 49.324,106.156 50.85,104.63 54.04,104.63 v1(54.11,104.56) ; v1(54.02,97.796) 54.076,97.74 69.502,97.74 U1.90@71.791,95.451
  Bottom Layer w0.254: v1(54.02,97.796) 54.02,103.743 54.056,103.779 54.056,104.506 v1(54.11,104.56)
SPI3_MOSI: J4.2 U1.80 | length 49.1
  Top Layer w0.254: J4.2@50.85,122.95 49.5,122.95 48.829,122.279 48.829,104.161 49.73,103.26 71.053,103.26 U1.80@75.326,98.986
SPI3_SCK: J4.3 U1.78 | length 52.9
  Top Layer w0.254: J4.3@50.85,124.95 53.1,124.95 53.51,124.54 53.51,118.868 53.361,118.719 50.418,118.719 50.12,118.421 50.12,106.13 50.909,105.341 70.386,105.341 U1.78@76.033,99.694
SWCLK: J3.2 U1.76 | length 36.3
  Top Layer w0.254: J3.2@58.437,122.3 62.22,122.3 62.962,121.558 62.962,106.399 63.111,106.25 70.891,106.25 U1.76@76.741,100.401
SWDIO: J3.4 U1.72 | length 61.7
  Top Layer w0.254: J3.4@58.29,126.41 58.31,126.43 63.37,126.43 v1(63.39,126.45) ; U1.72@80.276,99.34 89.33,108.394 89.33,126.161 89.181,126.31 v1(88.55,126.31)
  Bottom Layer w0.254: v1(63.39,126.45) 88.357,126.45 88.497,126.31 v1(88.55,126.31)
TX2: D4.1 R4.2 U3.14 | length 36.1
  Top Layer w0.254: U3.14@113.33,77.359 111.009,77.359 110.86,77.21 110.86,70.73 111.29,70.3 112.923,70.3 113.159,70.064 113.661,70.064 113.69,70.093 113.749,70.093 113.956,70.3 131.31,70.3 132.11,71.1 D4.1@132.11,73.98 133.871,73.98 R4.2@134.225,73.626
TX3: D10.1 R11.2 U6.14 | length 37
  Top Layer w0.254: U6.14@114.385,143.535 111.285,143.535 110.99,143.24 110.99,137.309 111.139,137.16 133.031,137.16 133.18,137.309 133.18,140.37 D10.1@133.19,140.38 134.877,140.38 R11.2@135.241,140.016
TX4: D3.1 R7.2 U3.7 | length 17.8
  Top Layer w0.254: U3.7@118.28,82.439 120.129,82.439 121.31,83.62 127.21,83.62 128.21,82.62 131.681,82.62 131.681,83.449 D3.1@131.63,83.5 134.035,83.5 R7.2@134.195,83.34
TX6: D7.1 R17.2 U6.7 | length 16.3
  Top Layer w0.254: U6.7@119.335,148.615 121.205,148.615 122.456,149.866 130.726,149.866 132.11,151.25 D7.1@132.31,151.25 134.115,151.25 R17.2@134.395,150.97
UART2_RX: U1.26 U3.12 | length 66.6
  Top Layer w0.254: U1.26@79.215,80.955 72.32,74.06 72.32,68.883 72.469,68.734 102.104,68.734 v1(103.85,70.48) ; v1(109.209,70.74) 109.209,70.884 108.739,71.354 108.739,79.75 108.888,79.899 U3.12@113.33,79.899
  Bottom Layer w0.254: v1(103.85,70.48) 103.895,70.525 108.301,70.525 108.428,70.652 109.121,70.652 v1(109.209,70.74)
UART2_TX: U1.25 U3.11 | length 69.4
  Top Layer w0.254: U1.25@76.741,80.955 71.238,75.453 71.238,68.429 71.387,68.28 102.73,68.28 103.838,69.388 v1(103.862,69.388) ; v1(108.531,69.68) 108.428,69.783 108.428,71.023 108.204,71.247 108.204,81.02 108.353,81.169 U3.11@113.33,81.169
  Bottom Layer w0.254: v1(103.862,69.388) 108.109,69.388 108.401,69.68 v1(108.531,69.68)
UART3_RX: U1.56 U6.12 | length 73.7
  Top Layer w0.254: U1.56@85.933,93.683 86.28,94.001 86.465,94.187 86.501,94.187 96.574,104.26 96.574,127.254 97.744,128.424 108.912,128.424 109.06,128.573 109.06,145.762 109.209,145.91 110.02,145.91 v1(110.04,145.89) ; v1(111.86,145.96) 111.917,146.017 114.328,146.017 U6.12@114.385,146.075
  Bottom Layer w0.254: v1(110.04,145.89) 110.075,145.925 111.825,145.925 v1(111.86,145.96)
UART3_TX: U1.55 U6.11 | length 73.9
  Top Layer w0.254: U1.55@86.286,93.33 97.04,104.083 97.04,126.93 98.08,127.97 109.591,127.97 109.74,128.119 109.74,144.404 111.02,145.684 111.02,146.61 111.755,147.345 U6.11@114.385,147.345
UART4_RX: U1.24 U3.9 | length 74.2
  Top Layer w0.254: U1.24@76.387,81.309 70.784,75.706 70.784,67.975 70.933,67.826 102.918,67.826 103.198,68.106 103.756,68.106 v1(103.86,68.21) ; v1(107.359,68.13) 107.359,68.278 107.159,68.477 107.159,83.56 107.308,83.709 U3.9@113.33,83.709
  Bottom Layer w0.254: v1(103.86,68.21) 103.9,68.17 107.319,68.17 v1(107.359,68.13)
UART4_TX: U1.23 U3.10 | length 75.5
  Top Layer w0.254: U1.23@76.033,81.662 70.33,75.959 70.33,67.521 70.479,67.372 100.693,67.372 100.995,67.07 v1(103.879,67.07) ; v1(108.14,67.15) 108.14,68.966 107.75,69.356 107.75,82.29 107.899,82.439 U3.10@113.33,82.439
  Bottom Layer w0.254: v1(103.879,67.07) 108.06,67.07 v1(108.14,67.15)
UART5_RX: U1.38 U8.13 | length 62.4
  Top Layer w0.254: U1.38@83.458,85.198 88.268,80.388 101.921,80.388 102.07,80.537 102.07,120.451 102.219,120.6 U8.13@103.85,120.6
UART5_TX: U1.39 U8.3 | length 64.9
  Top Layer w0.254: U1.39@83.812,85.551 83.841,85.551 88.55,80.842 101.059,80.842 101.208,80.991 101.208,118.629 v1(101.289,118.71) ; v1(106.978,118.89) 107.418,119.33 U8.3@108.8,119.33
  Bottom Layer w0.254: v1(101.289,118.71) 101.379,118.8 106.888,118.8 v1(106.978,118.89)
UART6_RX: U1.64 U6.9 | length 74.3
  Top Layer w0.254: U1.64@83.105,96.512 83.134,96.512 83.637,97.015 83.673,97.015 92.706,106.048 92.779,106.121 92.78,106.225 92.851,113.855 92.851,124.304 92.886,127.985 92.886,127.991 92.886,128.398 99.642,135.154 99.642,148.832 100.527,149.717 114.217,149.717 U6.9@114.385,149.885
UART6_TX: U1.63 U6.10 | length 73.3
  Top Layer w0.254: U1.63@83.458,96.158 93.239,105.939 93.239,106.606 93.305,113.782 93.305,124.116 93.34,127.797 93.34,127.803 93.34,128.21 100.096,134.966 100.096,148.176 100.535,148.615 U6.10@114.385,148.615
X_RX1: U7.12 U8.12 | length 23.8
  Top Layer w0.254: U8.12@103.85,121.87 105.563,121.87 105.711,122.019 105.711,126.552 106.574,127.414 115.646,127.414 116.04,127.02 116.04,122.39 115.71,122.06 U7.12@114.31,122.06
X_RX2: U7.9 U8.14 | length 18.4
  Top Layer w0.254: U8.14@103.85,119.33 106.017,119.33 106.165,119.479 106.165,126.265 106.86,126.96 113.79,126.96 114.093,126.657 114.093,126.038 114.261,125.87 U7.9@114.31,125.87
X_RX3: U4.4 U8.15 | length 30.9
  Top Layer w0.25: U8.15@103.85,118.06 105.797,118.06 106.55,117.307 106.55,112.59 106.385,112.425 103.099,112.425 102.953,112.279 102.953,97.927 103.703,97.177 U4.4@107.782,97.177
X_TX1: U7.11 U8.1 | length 10.9
  Top Layer w0.25: U8.1@108.8,116.79 110.347,116.79 110.77,117.213 110.77,121.24 112.01,122.48 112.01,122.95 112.39,123.33 U7.11@114.31,123.33
X_TX2: U7.10 U8.5 | length 7.2
  Top Layer w0.25: U8.5@108.8,121.87 110.112,121.87 111.2,122.958 111.2,123.92 111.88,124.6 U7.10@114.31,124.6
X_TX3: R8.1 U4.5 U8.2 | length 33.4
  Top Layer w0.25: v1@104.643,98.579 104.054,98.579 103.761,98.872 103.761,111.761 103.975,111.975 106.695,111.975 107.072,112.352 107.072,117.822 107.31,118.06 U8.2@108.115,118.06 ; v1@104.73,95.89 U4.5@107.765,95.89
  Top Layer w0.5: v1@104.643,98.579 v1(104.721,98.501) 104.721,100.986 R8.1@104.94,101.205 ; v1(104.71,95.87) v1@104.73,95.89 ; U4.5@107.765,95.89 U4.5@107.782,95.907 ; U8.2@108.115,118.06 U8.2@108.8,118.06
  Bottom Layer w0.5: v1(104.71,95.87) 104.721,95.881 v1(104.721,98.501)
XA: U1.40 U8.10 | length 64.4
  Top Layer w0.254: U1.40@84.165,85.905 88.774,81.296 100.311,81.296 100.46,81.445 100.46,124.09 100.78,124.41 U8.10@103.85,124.41
XB: U1.41 U8.9 | length 64.9
  Top Layer w0.254: U1.41@84.519,86.259 89.027,81.75 99.857,81.75 100.006,81.899 100.006,125.466 100.22,125.68 U8.9@103.85,125.68
Y_RX1: D12.2 R20.2 U7.13 | length 45
  Top Layer w0.25: U7.13@114.31,120.79 112.3,120.79 111.74,120.23 111.74,112.39 112.61,111.52 132.632,111.52
  Top Layer w0.254: 132.632,111.52 133.4,111.52 v1(133.43,111.49) ; D12.2@133.263,116.13 133.263,117.847 133.412,117.997 133.412,118.542 v1(133.45,118.58)
  Top Layer w0.5: D12.2@132.94,115.88 D12.2@133.013,115.88 ; D12.2@133.263,116.13 D12.2@133.013,115.88 ; R20.2@135.075,116.3 135.075,116.205 134.75,115.88 D12.2@133.013,115.88
  Bottom Layer w0.254: v1(133.43,111.49) 133.44,111.5 133.44,118.57 v1(133.45,118.58)
Y_RX2: D11.2 R22.2 U7.8 | length 18.2
  Top Layer w0.5: U7.8@119.26,125.87 120.79,125.87 121.19,126.27 121.19,127.207 121.483,127.5 128.43,127.5 129.37,128.44 131.897,128.44 132.19,128.147 132.19,127.55 132.44,127.3 D11.2@132.64,127.3 132.73,127.39 134.875,127.39 R22.2@134.965,127.48
Y_TX1: D12.1 R21.2 U7.14 | length 31.9
  Top Layer w0.25: U7.14@114.265,119.475 112.987,119.475 112.694,119.182 112.694,113.016 113.23,112.48 132.54,112.48
  Top Layer w0.254: 132.54,112.48 132.94,112.88 D12.1@132.94,113.98
  Top Layer w0.5: U7.14@114.265,119.475 U7.14@114.31,119.52 ; D12.1@132.94,113.98 132.975,114.015 135.14,114.015 R21.2@135.175,114.05
Y_TX2: D11.1 R23.2 U7.7 | length 17.6
  Top Layer w0.5: U7.7@119.26,124.6 121.41,124.6 122.01,125.2 126.777,125.2 127.07,124.907 127.34,124.907 128.197,124.05 131.999,124.05 132.292,124.343 132.292,125.15 132.542,125.4 D11.1@132.64,125.4 132.75,125.29 134.885,125.29 R23.2@134.995,125.18
pads on no net: H1.1 H2.1 H3.1 H4.1 H5.1 H6.1 J1.6 J1.10 J10.9 J10.10 J10.11 J11. J11.7 S1. U1.18 U1.34 U1.42 U1.43 U1.44 U1.45 U1.46 U1.47 U1.53 U1.54 U1.57 U1.81 U2.S1 U2.S2 U2.S3 U2.S4 U4.1 U4.2 U8.4 U8.6 U8.11 U11.1 U11.2 U11.3 U11.7 U12.7 U12.12 U12.13 U12.18 U12.23 U12.24 U12.26 U12.37 U12.38 U12.39 U12.40 U12.41 U12.42 U12.46 U12.47

## Polygon pours and split planes (outlines as drawn)
GND on Top Layer "GND_L01_P001" (solid, remove dead copper, pour order 1): -0.41,189.91 10.73,189.91 10.73,200.62 10.65,200.7 10.77,200.82 140.89,200.82 140.89,191.07 141,190.96 149.65,190.96 149.65,8.97 149.61,8.93 140.67,8.93 140.67,0.79 140.7,0.76 140.66,0.72 27.24,0.72 27.24,115.8 27.2,115.84 35.12,115.84 35.12,176.285 35.135,176.3 -0.33,176.3 -0.33,189.82 -0.41,189.9
DI_GND on Top Layer "DI_GND_L01_P003" (solid, remove dead copper, pour order 3): 26.73,115.57 -0.06,115.57 -0.1,115.53 -0.1,8.05 8.43,8.05 8.39,8.01 8.39,0.4 27.12,0.4 27.19,0.47 26.94,0.72 26.94,115.58
GND on Bottom Layer "GND_L02_P004" (solid, remove dead copper, pour order 4): -0.34,176.33 -0.38,176.37 -0.38,189.89 10.67,189.89 10.76,189.98 10.76,200.85 140.88,200.85 140.88,191.344 149.656,191.344 149.72,191.28 149.6,191.16 149.6,8.96 140.66,8.96 140.67,8.95 140.67,0.77 27.25,0.77 27.247,0.767 27.247,115.87 35.11,115.87 35.158,115.918 35.158,176.363 -0.307,176.363 -0.34,176.33 -0.34,189.85
DI_GND on Bottom Layer "DI_GND_L02_P002" (solid, remove dead copper, pour order 2): 26.91,115.55 -0.08,115.55 -0.08,8.07 -0.1,8.05 -0.08,8.03 8.41,8.03 8.41,0.42 8.39,0.4 26.901,0.4 26.901,115.541

## Silkscreen, mask and mechanical layers (free items; w line width, h text height)
Mechanical 1:
  lines w1.2: -0.127,0.48 149.987,0.48 149.987,200.66 -0.127,200.66 -0.127,0.48
Top 3D Body:
  lines w0.254: 93.472,34.484 93.472,62.484 148.472,62.484 148.472,34.484 93.472,34.484

## Text inside footprints (layer, text, board x,y; h text height)
J19: Mechanical 13 "PCB Edge" at 149.225,188.856 h0.81 r90
U11: Top Overlay "*" at 86.326,162.691 h1.27; Mechanical 13 "*" at 86.326,162.691 h1.27